# Allegro board pc042a_toplevel_13.brd
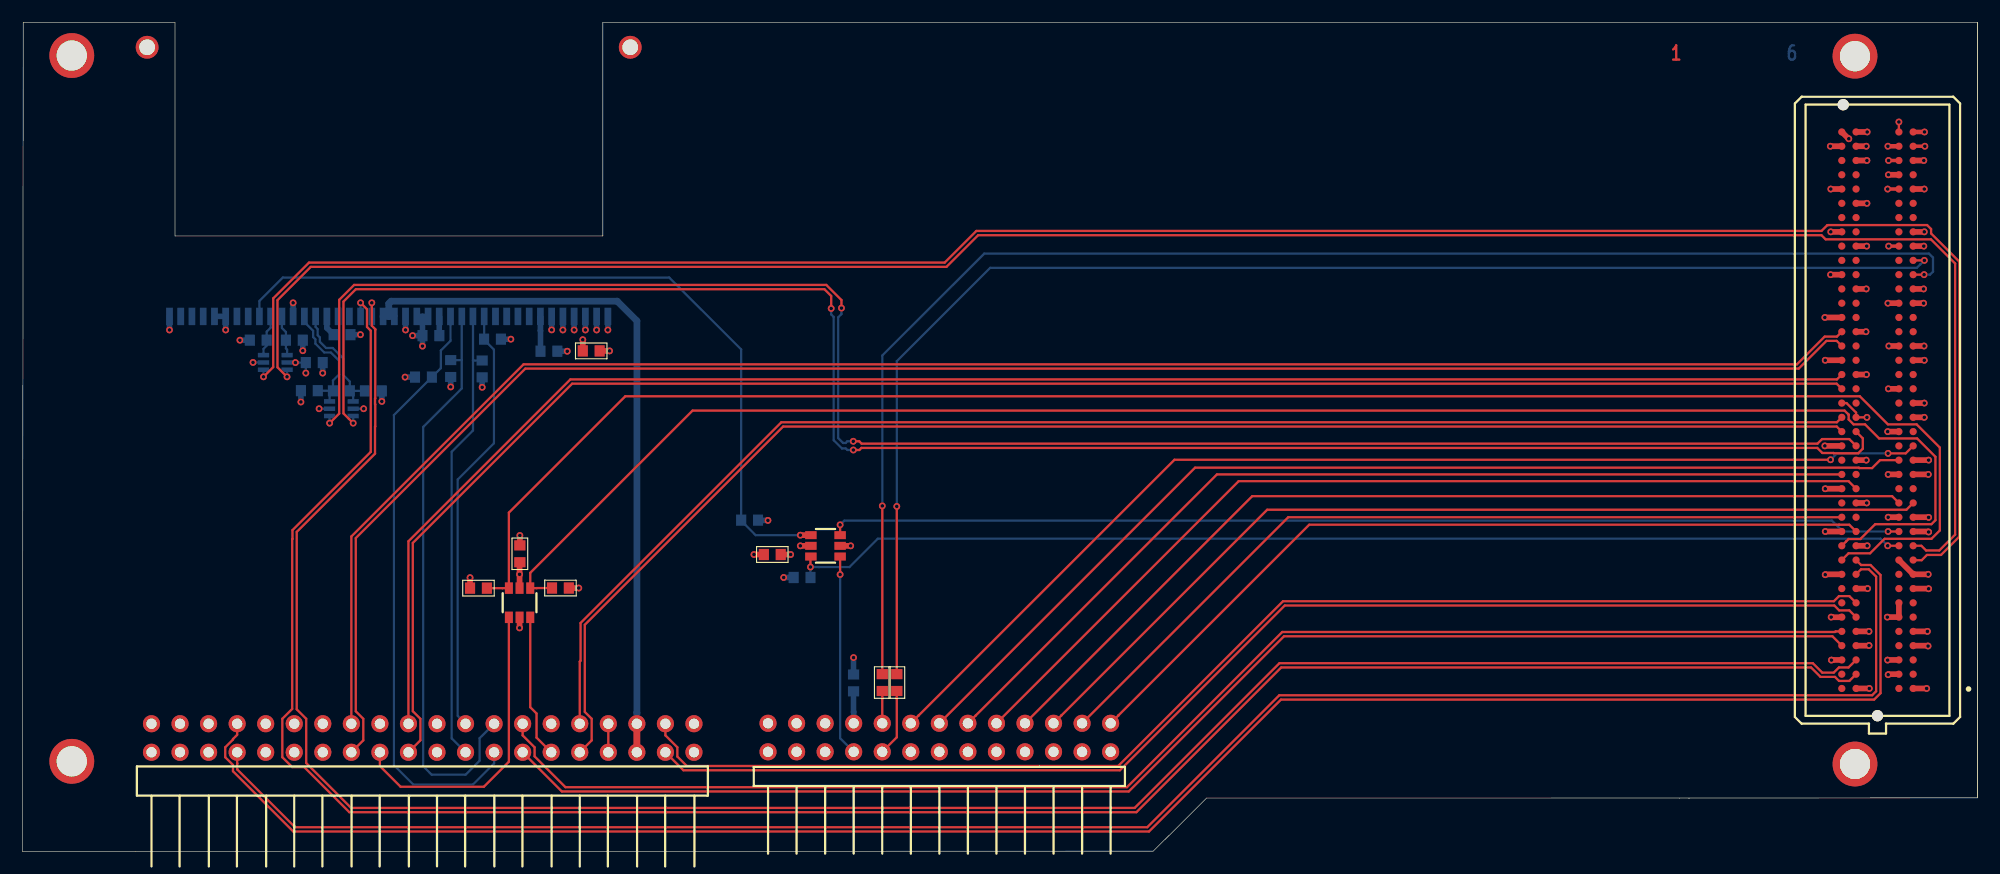
[diagram p0: board, top side]
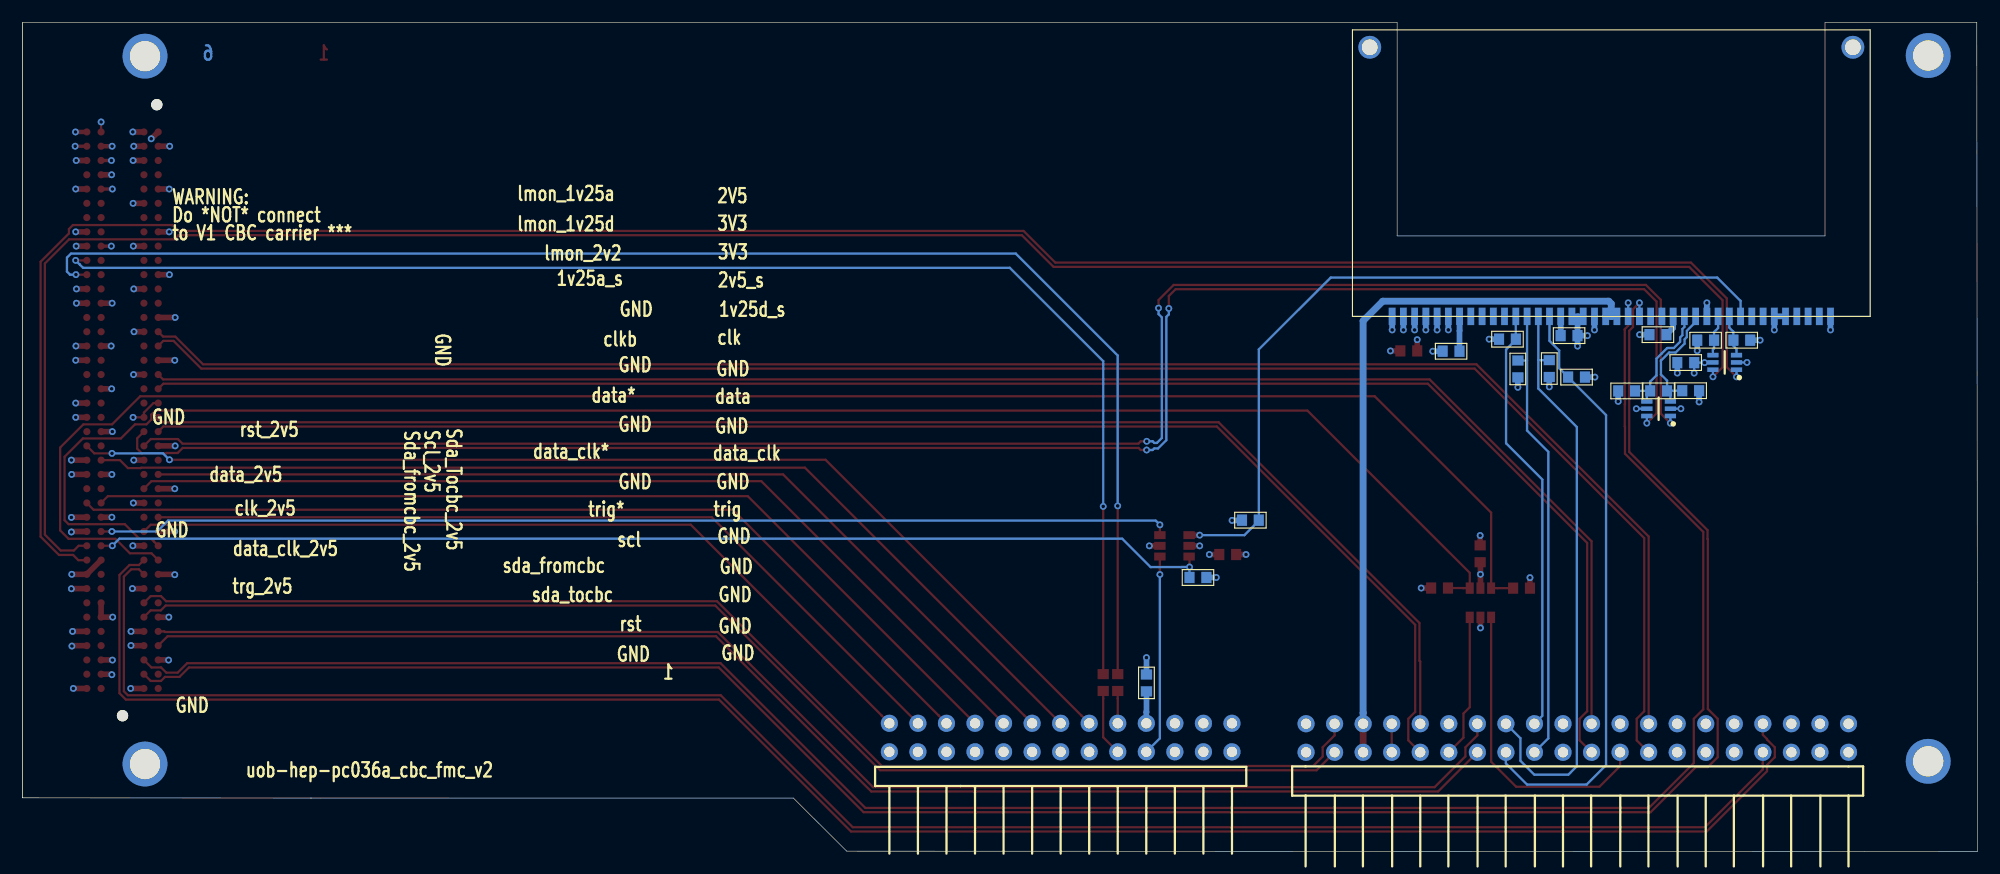
[diagram p1: board, bottom side, seen from below]

Outline 173.93 x 73.79 mm; copper layers: TOP, L2, L3, L4, L5, BOTTOM. Coordinates in mm from the lower left corner of the outline.
Outline path: 173.93,4.79 173.93,73.79 ; 0,0 10.06,0 100.6,0.03 105.34,4.76 147.45,4.76 148.27,4.76 148.27,4.76 173.93,4.78 173.93,4.8 173.93,73.79 51.64,73.79 51.64,54.8 51.63,54.79 13.57,54.79 13.57,73.79 0.07,73.79 0,0

## Design rules (mm)
net group FMC_LA: nets FMC_LA<1> FMC_LA<2> FMC_LA<17> FMC_LA<18> FMC_LA<20> FMC_LA<22> FMC_LA<23> FMC_LA<24> FMC_LA<25> FMC_LA<26> FMC_LA<27> FMC_LA<28> FMC_LA<29> FMC_LA<30> FMC_LA<31> FMC_LA<32> FMC_LA<33> RDATA2 RDATA3 RDATA6 RDATA7
net group FMC_LA*: nets FMC_LA*<1> FMC_LA*<2> FMC_LA*<7> FMC_LA*<8> FMC_LA*<9> FMC_LA*<10> FMC_LA*<11> FMC_LA*<12> FMC_LA*<13> FMC_LA*<14> FMC_LA*<17> FMC_LA*<18> FMC_LA*<20> FMC_LA*<22> FMC_LA*<23> FMC_LA*<24> FMC_LA*<25> FMC_LA*<26> FMC_LA*<27> FMC_LA*<28> FMC_LA*<29> FMC_LA*<30> FMC_LA*<31> FMC_LA*<32> FMC_LA*<33>

## Placement (name value [footprint] x y rotation side)
C3  100nF  [C0603]  50.6 44.56 180 top
C4  100nF  [C0603]  46.83 44.53 180 bottom
C5  100nF  [C0603]  36.34 45.92 0 bottom
C6  100nF  [C0603]  28.43 46 180 bottom
C7  1.0uF  [C0603]  66.71 26.44 0 top
C8  100nF  [C0603]  25.96 43.52 180 bottom
C9  1.0uF  [C0603]  44.25 26.5 270 top
IC1  -  [SOP65P210X110-6N]  28.37 39.41 0 bottom
IC2  -  [SOP65P210X110-6N]  22.49 43.53 0 bottom
J1  -  [CONHE13C2X20M]  11.48 11.37 90 bottom
J2  -  [CONHE13C2X13M]  66.33 11.41 270 bottom
J3  -  [SAMTEC_ASP-134606-01]  165.03 39.28 270 top
LK1  -  [FXG_M2-7]  163.03 70.79 0 top
LK2  -  [FXG_M2-7]  163.03 7.79 0 top
LK3  -  [FXG_M2-7]  4.39 8.03 0 top
LK4  -  [FXG_M2-7]  4.39 70.85 0 top
NOREF  -  []  27.73 -72.81 0 top
NOREF#2  -  []  173.93 4.79 90 top
NOREF#3  -  []  0 0 89.9 top
NOREF#4  -  []  0.07 73.79 0 top
R1  100  [C0603]  28.37 41 180 bottom
R2  390  [C0603]  31.22 40.99 0 bottom
R3  390  [C0603]  25.52 41.01 180 bottom
R4  10k  [C0603]  35.67 42.23 180 bottom
R5  10k  [C0603]  38.1 42.98 270 bottom
R6  10k  [C0603]  40.89 42.95 270 bottom
R7  10k  [C0603]  41.82 45.6 0 bottom
R8  00  [C0603]  73.94 15.01 90 bottom
R9  00  [C0603]  77.78 15.04 90 top
R10  00  [C0603]  76.49 15.04 90 top
R11  1k  [C0603]  69.35 24.39 180 bottom
R12  1k  [C0603]  40.57 23.44 180 top
R13  1k  [C0603]  47.86 23.45 0 top
R14  1k  [C0603]  64.69 29.49 0 bottom
R15  24  [C0603]  24.19 45.51 180 bottom
R16  24  [C0603]  20.98 45.51 0 bottom
U1  -  [SK_SAMTEC_MB1_140_01]  13.08 47.63 270 bottom
U2  -  [SOT23_6]  72.74 26.26 90 top
U3  -  [SOT23_6]  43.27 20.84 0 top

## Library data of the parts
C3-C6 C8 = CAPCERSMDCL2: part number: CAPCERSMDCL2_0603-100NF,16V; tolerance: 10%
C7 C9 = CAPCERSMDCL2: part number: CAPCERSMDCL2_0603-1.0UF,6.3V; tolerance: 10%
IC1 IC2 = ADCMP604: part number: ADCMP604BKSZ
J1 = CON40P: part number: CON40P-BARC2X20
J2 = CON26P: part number: CON26P-BARC2X13
J3 = CON160P_40CDGH: part number: ASP-134606-01
LK1-LK4 = 1-HOLE: part number: 1-HOLE_FXG2-7-BASE
R1 = RSMD0603: part number: RSMD0603_1/10W-100,1%; tolerance: 1%
R2 R3 = RSMD0603: part number: RSMD0603_1/10W-390,1%; tolerance: 1%
R4-R7 = RSMD0603: part number: RSMD0603_1/10W-10K,1%; tolerance: 1%
R8-R10 = RSMD0603: part number: RSMD0603_-00,
R11-R14 = RSMD0603: part number: RSMD0603_1/10W-1K,1%; tolerance: 1%
R15 R16 = RSMD0603: part number: RSMD0603_1/10W-24,1%; tolerance: 1%
U1 = SK-SAMTEC-40PIN-MB1: part number: SK-SAMTEC-40PIN-MB1_RT-SMT-SAMTEC
U2 U3 = SN74AUC2G07: part number: SN74AUC2G07_SOT-TI

## Footprints (pads in the part's own frame, mm; a bottom-side part is the same pattern mirrored in y, then rotated)
C0603
  rect 0.9x1 smd: 1(-0.75,0) 2(0.75,0)
CONHE13C2X13M
  round 1.524 hole 0.914: 1(0,0) 2(2.54,0) 3(0,-2.54) 4(2.54,-2.54) 5(0,-5.08) 6(2.54,-5.08) 7(0,-7.62) 8(2.54,-7.62) 9(0,-10.16) 10(2.54,-10.16) 11(0,-12.7) 12(2.54,-12.7) 13(0,-15.24) 14(2.54,-15.24) 15(0,-17.78) 16(2.54,-17.78) 17(0,-20.32) 18(2.54,-20.32) 19(0,-22.86) 20(2.54,-22.86) 21(0,-25.4) 22(2.54,-25.4) 23(0,-27.94) 24(2.54,-27.94) 25(0,-30.48) 26(2.54,-30.48)
CONHE13C2X20M
  round 1.524 hole 0.914: 1(0,0) 2(-2.54,0) 3(0,2.54) 4(-2.54,2.54) 5(0,5.08) 6(-2.54,5.08) 7(0,7.62) 8(-2.54,7.62) 9(0,10.16) 10(-2.54,10.16) 11(0,12.7) 12(-2.54,12.7) 13(0,15.24) 14(-2.54,15.24) 15(0,17.78) 16(-2.54,17.78) 17(0,20.32) 18(-2.54,20.32) 19(0,22.86) 20(-2.54,22.86) 21(0,25.4) 22(-2.54,25.4) 23(0,27.94) 24(-2.54,27.94) 25(0,30.48) 26(-2.54,30.48) 27(0,33.02) 28(-2.54,33.02) 29(0,35.56) 30(-2.54,35.56) 31(0,38.1) 32(-2.54,38.1) 33(0,40.64) 34(-2.54,40.64) 35(0,43.18) 36(-2.54,43.18) 37(0,45.72) 38(-2.54,45.72) 39(0,48.26) 40(-2.54,48.26)
FXG_M2-7
  round 3.988 hole 2.692: 1(0,0)
SAMTEC_ASP-134606-01
  round 1 hole 1.3 unplated: (-27.19,-3.05) (27.19,0)
  round 0.64 smd: C1(24.765,3.175) C2(23.495,3.175) C3(22.225,3.175) C4(20.955,3.175) C5(19.685,3.175) C6(18.415,3.175) C7(17.145,3.175) C8(15.875,3.175) C9(14.605,3.175) C10(13.335,3.175) C11(12.065,3.175) C12(10.795,3.175) C13(9.525,3.175) C14(8.255,3.175) C15(6.985,3.175) C16(5.715,3.175) C17(4.445,3.175) C18(3.175,3.175) C19(1.905,3.175) C20(0.635,3.175) C21(-0.635,3.175) C22(-1.905,3.175) C23(-3.175,3.175) C24(-4.445,3.175) C25(-5.715,3.175) C26(-6.985,3.175) C27(-8.255,3.175) C28(-9.525,3.175) C29(-10.795,3.175) C30(-12.065,3.175) C31(-13.335,3.175) C32(-14.605,3.175) C33(-15.875,3.175) C34(-17.145,3.175) C35(-18.415,3.175) C36(-19.685,3.175) C37(-20.955,3.175) C38(-22.225,3.175) C39(-23.495,3.175) C40(-24.765,3.175) D1(24.765,1.905) D2(23.495,1.905) D3(22.225,1.905) D4(20.955,1.905) D5(19.685,1.905) D6(18.415,1.905) D7(17.145,1.905) D8(15.875,1.905) D9(14.605,1.905) D10(13.335,1.905) D11(12.065,1.905) D12(10.795,1.905) D13(9.525,1.905) D14(8.255,1.905) D15(6.985,1.905) D16(5.715,1.905) D17(4.445,1.905) D18(3.175,1.905) D19(1.905,1.905) D20(0.635,1.905) D21(-0.635,1.905) D22(-1.905,1.905) D23(-3.175,1.905) D24(-4.445,1.905) D25(-5.715,1.905) D26(-6.985,1.905) D27(-8.255,1.905) D28(-9.525,1.905) D29(-10.795,1.905) D30(-12.065,1.905) D31(-13.335,1.905) D32(-14.605,1.905) D33(-15.875,1.905) D34(-17.145,1.905) D35(-18.415,1.905) D36(-19.685,1.905) D37(-20.955,1.905) D38(-22.225,1.905) D39(-23.495,1.905) D40(-24.765,1.905) G1(24.765,-1.905) G2(23.495,-1.905) G3(22.225,-1.905) G4(20.955,-1.905) G5(19.685,-1.905) G6(18.415,-1.905) G7(17.145,-1.905) G8(15.875,-1.905) G9(14.605,-1.905) G10(13.335,-1.905) G11(12.065,-1.905) G12(10.795,-1.905) G13(9.525,-1.905) G14(8.255,-1.905) G15(6.985,-1.905) G16(5.715,-1.905) G17(4.445,-1.905) G18(3.175,-1.905) G19(1.905,-1.905) G20(0.635,-1.905) G21(-0.635,-1.905) G22(-1.905,-1.905) G23(-3.175,-1.905) G24(-4.445,-1.905) G25(-5.715,-1.905) G26(-6.985,-1.905) G27(-8.255,-1.905) G28(-9.525,-1.905) G29(-10.795,-1.905) G30(-12.065,-1.905) G31(-13.335,-1.905) G32(-14.605,-1.905) G33(-15.875,-1.905) G34(-17.145,-1.905) G35(-18.415,-1.905) G36(-19.685,-1.905) G37(-20.955,-1.905) G38(-22.225,-1.905) G39(-23.495,-1.905) G40(-24.765,-1.905) H1(24.765,-3.175) H2(23.495,-3.175) H3(22.225,-3.175) H4(20.955,-3.175) H5(19.685,-3.175) H6(18.415,-3.175) H7(17.145,-3.175) H8(15.875,-3.175) H9(14.605,-3.175) H10(13.335,-3.175) H11(12.065,-3.175) H12(10.795,-3.175) H13(9.525,-3.175) H14(8.255,-3.175) H15(6.985,-3.175) H16(5.715,-3.175) H17(4.445,-3.175) H18(3.175,-3.175) H19(1.905,-3.175) H20(0.635,-3.175) H21(-0.635,-3.175) H22(-1.905,-3.175) H23(-3.175,-3.175) H24(-4.445,-3.175) H25(-5.715,-3.175) H26(-6.985,-3.175) H27(-8.255,-3.175) H28(-9.525,-3.175) H29(-10.795,-3.175) H30(-12.065,-3.175) H31(-13.335,-3.175) H32(-14.605,-3.175) H33(-15.875,-3.175) H34(-17.145,-3.175) H35(-18.415,-3.175) H36(-19.685,-3.175) H37(-20.955,-3.175) H38(-22.225,-3.175) H39(-23.495,-3.175) H40(-24.765,-3.175)
SK_SAMTEC_MB1_140_01
  round 2.032 hole 1.4: (-23.952,-40.99) (-23.952,1.99)
  rect 1.55x0.6 smd: 1(0,0) 2(0,-1) 3(0,-2) 4(0,-3) 5(0,-4) 6(0,-5) 7(0,-6) 8(0,-7) 9(0,-8) 10(0,-9) 11(0,-10) 12(0,-11) 13(0,-12) 14(0,-13) 15(0,-14) 16(0,-15) 17(0,-16) 18(0,-17) 19(0,-18) 20(0,-19) 21(0,-20) 22(0,-21) 23(0,-22) 24(0,-23) 25(0,-24) 26(0,-25) 27(0,-26) 28(0,-27) 29(0,-28) 30(0,-29) 31(0,-30) 32(0,-31) 33(0,-32) 34(0,-33) 35(0,-34) 36(0,-35) 37(0,-36) 38(0,-37) 39(0,-38) 40(0,-39)
SOP65P210X110-6N
  rect 1x0.4 smd: 1(-1.05,0.65) 2(-1.05,0) 3(-1.05,-0.65) 4(1.05,-0.65) 5(1.05,0) 6(1.05,0.65)
SOT23_6
  rect 0.711x1.016 smd: 1(0,0) 2(0.95,0) 3(1.9,0) 4(1.9,2.6) 5(0.95,2.6) 6(0,2.6)

## Nets
GND_SIGNAL: C3.1(A<0>) C4.1(A<0>) C5.1(A<0>) C6.1(A<0>) C7.1(A<0>) C8.1(A<0>) C9.1(A<0>) IC1.2(VEE) IC2.2(VEE) J1.2(A<1>) J1.5(A<4>) J1.6(A<5>) J1.9(A<8>) J1.10(A<9>) J1.13(A<12>) J1.14(A<13>) J2.6(A<5>) J2.12(A<11>) J2.14(A<13>) J2.16(A<15>) J2.18(A<17>) J2.20(A<19>) J2.22(A<21>) J2.24(A<23>) J2.26(A<25>) J3.C1(C<1>) J3.C4(C<4>) J3.C5(C<5>) J3.C8(C<8>) J3.C9(C<9>) J3.C12(C<12>) J3.C13(C<13>) J3.C16(C<16>) J3.C17(C<17>) J3.C20(C<20>) J3.C21(C<21>) J3.C24(C<24>) J3.C25(C<25>) J3.C28(C<28>) J3.C29(C<29>) J3.C32(C<32>) J3.C33(C<33>) J3.C36(C<36>) J3.C38(C<38>) J3.C40(C<40>) J3.D2(D<2>) J3.D3(D<3>) J3.D6(D<6>) J3.D7(D<7>) J3.D10(D<10>) J3.D13(D<13>) J3.D16(D<16>) J3.D19(D<19>) J3.D22(D<22>) J3.D25(D<25>) J3.D28(D<28>) J3.D37(D<37>) J3.D39(D<39>) J3.G1(G<1>) J3.G4(G<4>) J3.G5(G<5>) J3.G8(G<8>) J3.G11(G<11>) J3.G14(G<14>) J3.G17(G<17>) J3.G20(G<20>) J3.G23(G<23>) J3.G26(G<26>) J3.G29(G<29>) J3.G32(G<32>) J3.G35(G<35>) J3.G38(G<38>) J3.G40(G<40>) J3.H3(H<3>) J3.H6(H<6>) J3.H9(H<9>) J3.H12(H<12>) J3.H15(H<15>) J3.H18(H<18>) J3.H21(H<21>) J3.H24(H<24>) J3.H27(H<27>) J3.H30(H<30>) J3.H33(H<33>) J3.H36(H<36>) J3.H39(H<39>) LK1.1(A<0>) LK2.1(A<0>) LK3.1(A<0>) LK4.1(A<0>) R15.1(A<0>) R16.1(A<0>) U1.1(A<0>) U1.5(A<4>) U1.6(A<5>) U1.12(A<11>) U1.23(A<22>) U1.24(A<23>) U1.37(A<36>) U1.38(A<37>) U1.39(A<38>) U1.40(A<39>) U2.2 U3.2
P1V5A: J1.35(A<34>) J1.36(A<35>) U1.20(A<19>) U1.21(A<20>)
P2V5: C7.2(B<0>) J3.G39(G<39>) J3.H40(H<40>) R11.2(B<0>) R12.2(B<0>) R13.2(B<0>) U2.5
P3V3: C9.2(B<0>) J3.C39(C<39>) J3.D32(D<32>) J3.D36(D<36>) J3.D38(D<38>) J3.D40(D<40>) R8.2(B<0>) R14.2(B<0>) U3.5
P5V: J1.17(A<16>)
P12V: J3.C35(C<35>) J3.C37(C<37>)
A0: J1.23(A<22>) R7.1(A<0>) U1.29(A<28>)
A1: J1.24(A<23>) R6.1(A<0>) U1.28(A<27>)
A1+: J1.12(A<11>)
A1-: J1.11(A<10>)
A2: J1.25(A<24>) R5.1(A<0>) U1.27(A<26>)
A2+: J1.4(A<3>)
A2-: J1.3(A<2>)
A3: J1.26(A<25>) R4.1(A<0>) U1.26(A<25>)
BIAS: J1.40(A<39>)
BIAS_GND: J1.39(A<38>)
CA1+: IC2.3(+IN) R16.2(B<0>) U1.10(A<9>)
CA1-: IC2.4(-IN) R15.2(B<0>) U1.11(A<10>)
CCLK_ROC+: J3.G2(G<2>) U1.18(A<17>)
CCLK_ROC-: J3.G3(G<3>) U1.19(A<18>)
CCLK_SEL: U1.4(A<3>)
CCTR+: U1.16(A<15>)
CCTR-: U1.17(A<16>)
CI2C_CLK+: U1.2(A<1>)
CI2C_CLK-: U1.3(A<2>)
CI2C_DAT+: U1.30(A<29>)
CI2C_DAT-: U1.31(A<30>)
CRESET*: R14.1(A<0>) U1.9(A<8>) U2.4(Y)
CTIN+: U1.7(A<6>)
CTIN-: U1.8(A<7>)
CTOUT+: U1.32(A<31>)
CTOUT-: U1.33(A<32>)
CTRIGOUT+: IC1.3(+IN) R1.2(B<0>) R3.1(A<0>) U1.13(A<12>)
CTRIGOUT-: IC1.4(-IN) R1.1(A<0>) R2.1(A<0>) U1.14(A<13>)
DP0_C2M: J3.C2(C<2>)
DP0_C2M*: J3.C3(C<3>)
DP0_M2C: J3.C6(C<6>)
DP0_M2C*: J3.C7(C<7>)
FA1+: IC2.1(Q) J3.C10(C<10>)
FA1-: IC2.6(Q*) J3.C11(C<11>)
FCLK_SEL_IN: J3.H10(H<10>) R12.1(A<0>) U3.6(Y)
FMC_LA*<1>: J3.D9(D<9>)
FMC_LA*<2>: J3.H8(H<8>)
FMC_LA*<7>: J3.H14(H<14>)
FMC_LA*<8>: J3.G13(G<13>)
FMC_LA*<9>: J3.D15(D<15>)
FMC_LA*<10>: J3.C15(C<15>)
FMC_LA*<11>: J3.H17(H<17>)
FMC_LA*<12>: J3.G16(G<16>)
FMC_LA*<13>: J3.D18(D<18>)
FMC_LA*<14>: J3.C19(C<19>)
FMC_LA*<17>: J3.D21(D<21>)
FMC_LA*<18>: J3.C23(C<23>)
FMC_LA*<20>: J3.G22(G<22>)
FMC_LA*<22>: J3.G25(G<25>)
FMC_LA*<23>: J3.D24(D<24>)
FMC_LA*<24>: J3.H29(H<29>)
FMC_LA*<25>: J3.G28(G<28>)
FMC_LA*<26>: J3.D27(D<27>)
FMC_LA*<27>: J3.C27(C<27>)
FMC_LA*<28>: J3.H32(H<32>)
FMC_LA*<29>: J3.G31(G<31>)
FMC_LA*<30>: J3.H35(H<35>)
FMC_LA*<31>: J3.G34(G<34>)
FMC_LA*<32>: J3.H38(H<38>)
FMC_LA*<33>: J3.G37(G<37>)
FMC_LA<1>: J3.D8(D<8>)
FMC_LA<2>: J3.H7(H<7>)
FMC_LA<17>: J3.D20(D<20>)
FMC_LA<18>: J3.C22(C<22>)
FMC_LA<20>: J3.G21(G<21>)
FMC_LA<22>: J3.G24(G<24>)
FMC_LA<23>: J3.D23(D<23>)
FMC_LA<24>: J3.H28(H<28>)
FMC_LA<25>: J3.G27(G<27>)
FMC_LA<26>: J3.D26(D<26>)
FMC_LA<27>: J3.C26(C<26>)
FMC_LA<28>: J3.H31(H<31>)
FMC_LA<29>: J3.G30(G<30>)
FMC_LA<30>: J3.H34(H<34>)
FMC_LA<31>: J3.G33(G<33>)
FMC_LA<32>: J3.H37(H<37>)
FMC_LA<33>: J3.G36(G<36>)
FMC_PRSNT_M2C_L: J3.H2(H<2>)
FMC_PWR_GOOD_FLASH_RST_B: J3.D1(D<1>)
FMC_TCK_BUF: J3.D29(D<29>)
FMC_TDO: J3.D31(D<31>)
FMC_TMS_BUF: J3.D33(D<33>)
FPGA_TDO: J3.D30(D<30>)
FPON: J3.D11(D<11>) R11.1(A<0>) U2.6(Y)
FRESET_IN*: J3.H11(H<11>) R13.1(A<0>) U3.4(Y)
FRESET_OUT*: J3.D12(D<12>) U2.3(A)
FTRIGOUT+: IC1.1(Q) J3.G18(G<18>)
FTRIGOUT-: IC1.6(Q*) J3.G19(G<19>)
GA0: J3.C34(C<34>)
GA1: J3.D35(D<35>)
GBTCLK0_M2C: J3.D4(D<4>)
GBTCLK0_M2C*: J3.D5(D<5>)
IIC_SCL_MAIN: J3.C30(C<30>) R10.2(B<0>)
IIC_SDA_MAIN: J3.C31(C<31>) R9.2(B<0>)
RCLK_ROC+: J1.28(A<27>) J3.H4(H<4>)
RCLK_ROC-: J1.27(A<26>) J3.H5(H<5>)
RCLK_SEL: J1.18(A<17>) U3.1(A)
RCTR+: J1.32(A<31>) J3.H19(H<19>)
RCTR-: J1.31(A<30>) J3.H20(H<20>)
RDATA0: J2.11(A<10>) J3.C18(C<18>)
RDATA1: J2.13(A<12>) J3.D17(D<17>)
RDATA2: J2.15(A<14>) J3.H16(H<16>)
RDATA3: J2.17(A<16>) J3.G15(G<15>)
RDATA4: J2.19(A<18>) J3.D14(D<14>)
RDATA5: J2.21(A<20>) J3.C14(C<14>)
RDATA6: J2.23(A<22>) J3.H13(H<13>)
RDATA7: J2.25(A<24>) J3.G12(G<12>)
RI2C_CLK+: J1.22(A<21>)
RI2C_CLK-: J1.21(A<20>)
RI2C_DAT+: J1.38(A<37>) J3.G6(G<6>)
RI2C_DAT-: J1.37(A<36>) J3.G7(G<7>)
RPON: J2.8(A<7>) U2.1(A)
RRESET*: J1.30(A<29>) U3.3(A)
RTIN+: J1.20(A<19>) J3.H22(H<22>)
RTIN-: J1.19(A<18>) J3.H23(H<23>)
RTOUT+: J1.16(A<15>) J3.H25(H<25>)
RTOUT-: J1.15(A<14>) J3.H26(H<26>)
RTRIGOUT+: J1.8(A<7>) J3.G9(G<9>)
RTRIGOUT-: J1.7(A<6>) J3.G10(G<10>)
SUPPLY_1: C3.2(B<0>) C8.2(B<0>) IC1.5(VCC) IC2.5(VCC) J1.33(A<32>) J1.34(A<33>) R2.2(B<0>) R3.2(B<0>) R4.2(B<0>) R5.2(B<0>) R6.2(B<0>) R7.2(B<0>) U1.22(A<21>) U1.35(A<34>) U1.36(A<35>)
TRST_L: J3.D34(D<34>)
UNNAMED_2_CAPCERSMDCL2_I501_B: C6.2(B<0>) U1.15(A<14>)
UNNAMED_2_CAPCERSMDCL2_I503_B: C5.2(B<0>) U1.25(A<24>)
UNNAMED_2_CAPCERSMDCL2_I505_B: C4.2(B<0>) U1.34(A<33>)
UNNAMED_8_CON26P_I485_A: J2.7(A<6>) R8.1(A<0>)
UNNAMED_8_CON26P_I485_A_1: J2.10(A<9>) R9.1(A<0>)
UNNAMED_8_CON26P_I485_A_2: J2.9(A<8>) R10.1(A<0>)
VREF_A_M2C: J3.H1(H<1>)

Pads without a net: J1 1 29; J2 1 2 3 4 5

## Via types
v1: diameter 0.61, hole 0.33, TOP to BOTTOM, 129 vias

## Routing (per net, layer and track width the routed paths; a pad name or vN(x,y) marks a point on that pad's centre or on a via; arc(x,y) is an arc through that point)
GND_SIGNAL: length 327.9
  TOP w0.2: 161.86,39.91 162.28,39.91 163.13,39.06 163.13,38.64 v1(164.09,38.64)
  TOP w0.4: 168.21,64.04 v1(169.22,64.04) ; J3.D39 v1(165.96,62.77)
  TOP w0.5: v1(165.98,15.74) 166.03,15.78 166.94,15.78 ; 166.94,22.13 166.94,20.86 v1(165.91,20.86) ; J3.C24 v1(169.19,43.72) ; v1(169.55,24.67) J3.C9 166.94,25.94 ; J3.G14 v1(164.07,31.02) ; v1(164.28,18.34) 164.27,18.32 J3.G4 ; J3.H30 v1(160.86,51.34) ; 168.21,38.64 v1(169.19,38.64) ; J3.C5 v1(169.48,19.59) ; 161.86,17.05 161.08,17.05 161.06,17.04 v1(160.93,17.04) ; v1(160.38,24.64) 160.42,24.67 161.86,24.67 ; 163.13,50.07 v1(164.03,50.07) ; J3.G1 v1(164.31,14.51) ; v1(169.53,18.29) 169.5,18.32 J3.C4 ; 163.13,46.26 v1(164.01,46.26) ; J3.H36 v1(160.88,58.96) ; 166.94,17.05 165.95,17.05 v1(165.93,17.04) ; J3.G11 v1(164.11,27.21) ; 163.13,23.4 v1(164.15,23.4) ; J3.G5 v1(164.28,19.59) ; U3.2 v1(44.22,19.9) ; J3.C1 v1(169.41,14.51) ; C3.1 v1(52.23,44.56) ; v1(160.91,20.86) 161.02,20.86 161.03,20.85 161.74,20.85 161.76,20.86 161.86,20.86 ; 168.21,48.8 v1(169.13,48.8) ; C9.1 v1(44.25,28.13) ; J3.C17 169.58,34.83 v1(169.58,34.84) ; 168.21,23.4 169.57,23.4 v1(169.58,23.39) ; J3.H33 v1(160.88,55.15) ; 168.21,53.88 v1(169.15,53.88) ; 163.13,64.04 v1(164.11,64.04) ; J3.C21 v1(169.19,39.91) ; C7.1 v1(65.08,26.44) ; 166.94,37.37 v1(165.94,37.37) ; U2.2 v1(73.68,27.21) ; 168.21,44.99 v1(169.17,44.99) ; J3.C12 169.54,28.48 v1(169.58,28.44) ; J3.D25 v1(166.04,44.99) ; 163.13,53.88 v1(164.07,53.88) ; J3.C13 169.57,29.75 v1(169.58,29.74) ; J3.D28 v1(165.96,48.8) ; 166.94,41.18 v1(166,41.18) ; J3.H39 v1(160.84,62.77) ; 163.13,61.5 v1(164.09,61.5) ; J3.H24 v1(160.38,43.72) ; 161.86,28.48 v1(160.39,28.48) ; 166.94,33.56 v1(165.98,33.56) ; 168.21,55.15 v1(169.19,55.15) ; 161.86,36.1 v1(160.35,36.1) ; J3.G17 v1(164.03,34.83) ; v1(160.38,32.29) 160.39,32.29 161.86,32.29 ; 163.13,42.45 v1(164.05,42.45) ; 168.21,61.5 v1(169.15,61.5) ; J3.D37 v1(166,60.23) ; 163.13,57.69 v1(164.09,57.69) ; 166.94,29.75 v1(165.98,29.75) ; J3.H27 v1(160.35,47.53) ; J3.C16 v1(169.56,33.56) ; 168.21,50.07 v1(169.13,50.07) ; 168.21,58.96 v1(169.19,58.96)
  L2 w0.2: J2.16 85.3,8.87 ; J2.16 83.22,9.77 ; J2.16 84.11,10.06 ; J2.16 83.22,7.98 ; J2.16 85,9.77 ; J2.16 84.11,7.68 ; J2.16 85,7.98 ; J2.16 82.92,8.87 ; J1.13 27.61,12.27 ; J1.13 25.83,12.27 ; J1.13 27.91,11.37 ; J1.13 27.61,10.48 ; J1.13 25.53,11.37 ; J1.13 25.83,10.48 ; J1.13 26.72,10.18 ; J1.13 26.72,12.56 ; 1.74,70.85 LK4.1 ; LK4.1 2.46,68.92 ; LK4.1 4.39,68.2 ; LK4.1 7.04,70.85 ; LK4.1 6.31,68.92 ; LK4.1 6.31,72.77 ; LK4.1 2.46,72.77 ; J2.20 90.38,8.87 ; J2.20 89.19,7.68 ; J2.20 88,8.87 ; J2.20 90.08,9.77 ; J2.20 88.3,7.98 ; J2.20 88.3,9.77 ; J2.20 90.08,7.98 ; J2.20 89.19,10.06 ; 21.64,7.64 J1.10 ; J1.10 21.64,10.02 ; J1.10 22.53,9.73 ; J1.10 22.83,8.83 ; J1.10 20.45,8.83 ; J1.10 20.75,7.94 ; J1.10 22.53,7.94 ; J1.10 20.75,9.73 ; J2.12 79.03,10.06 ; J2.12 78.14,7.98 ; J2.12 79.92,9.77 ; J2.12 78.14,9.77 ; J2.12 79.92,7.98 ; J2.12 77.84,8.87 ; J2.12 80.22,8.87 ; J2.12 79.03,7.68 ; 15.67,9.73 J1.6 ; J1.6 15.37,8.83 ; J1.6 15.67,7.94 ; J1.6 16.56,7.64 ; J1.6 17.75,8.83 ; J1.6 16.56,10.02 ; J1.6 17.45,9.73 ; J1.6 17.45,7.94 ; 96.81,7.68 J2.26 ; J2.26 95.62,8.87 ; J2.26 96.81,10.06 ; J2.26 95.92,9.77 ; J2.26 98,8.87 ; J2.26 97.7,9.77 ; J2.26 97.7,7.98 ; J2.26 95.92,7.98 ; 20.75,12.27 J1.9 ; J1.9 21.64,10.18 ; J1.9 22.53,12.27 ; J1.9 20.75,10.48 ; J1.9 22.53,10.48 ; J1.9 22.83,11.37 ; J1.9 21.64,12.56 ; J1.9 20.45,11.37 ; LK3.1 6.31,6.1 ; LK3.1 1.74,8.03 ; LK3.1 6.31,9.95 ; LK3.1 2.46,9.95 ; LK3.1 4.39,10.68 ; LK3.1 7.04,8.03 ; LK3.1 2.46,6.1 ; LK3.1 4.39,5.38 ; 80.68,9.77 J2.14 ; J2.14 80.68,7.98 ; J2.14 82.76,8.87 ; J2.14 80.38,8.87 ; J2.14 81.57,7.68 ; J2.14 82.46,9.77 ; J2.14 82.46,7.98 ; J2.14 81.57,10.06 ; J2.22 92.62,9.77 ; J2.22 91.73,10.06 ; J2.22 92.92,8.87 ; J2.22 90.84,9.77 ; J2.22 90.84,7.98 ; J2.22 91.73,7.68 ; J2.22 90.54,8.87 ; J2.22 92.62,7.98 ; J2.6 72.3,9.77 ; J2.6 72.3,7.98 ; J2.6 71.41,7.68 ; J2.6 71.41,10.06 ; J2.6 70.52,9.77 ; J2.6 70.52,7.98 ; J2.6 72.6,8.87 ; J2.6 70.22,8.87 ; J1.2 12.67,8.83 ; J1.2 10.29,8.83 ; J1.2 11.48,10.02 ; J1.2 11.48,7.64 ; J1.2 12.37,9.73 ; J1.2 10.59,7.94 ; J1.2 12.37,7.94 ; J1.2 10.59,9.73 ; 161.11,72.71 LK1.1 ; LK1.1 164.96,68.86 ; LK1.1 165.68,70.79 ; LK1.1 163.03,68.14 ; LK1.1 161.11,68.86 ; LK1.1 164.96,72.71 ; LK1.1 160.38,70.79 ; 25.53,8.83 J1.14 ; J1.14 27.61,7.94 ; J1.14 26.72,7.64 ; J1.14 27.61,9.73 ; J1.14 25.83,7.94 ; J1.14 26.72,10.02 ; J1.14 27.91,8.83 ; J1.14 25.83,9.73 ; J2.18 86.65,10.06 ; J2.18 87.54,7.98 ; J2.18 87.84,8.87 ; J2.18 86.65,7.68 ; J2.18 85.46,8.87 ; J2.18 85.76,9.77 ; J2.18 87.54,9.77 ; J2.18 85.76,7.98 ; J2.24 94.27,10.06 ; J2.24 93.08,8.87 ; J2.24 95.46,8.87 ; J2.24 95.16,9.77 ; J2.24 95.16,7.98 ; J2.24 93.38,9.77 ; J2.24 94.27,7.68 ; J2.24 93.38,7.98 ; J1.5 17.75,11.37 ; J1.5 17.45,12.27 ; J1.5 15.37,11.37 ; J1.5 17.45,10.48 ; J1.5 16.56,12.56 ; J1.5 15.67,12.27 ; J1.5 15.67,10.48 ; J1.5 16.56,10.18 ; LK2.1 165.68,7.79 ; LK2.1 161.11,9.71 ; LK2.1 160.38,7.79 ; LK2.1 163.03,10.44 ; LK2.1 161.11,5.86 ; LK2.1 164.96,9.71 ; LK2.1 164.96,5.86
  BOTTOM w0.2: IC1.2 v1(26.39,39.41) ; IC2.2 v1(20.51,43.53)
  BOTTOM w0.5: U1.1 v1(13.08,46.42) ; R16.1 v1(19.34,45.51) ; C5.1 v1(34.7,45.92) ; C5.1 v1(35.59,44.98) ; C5.1 35.59,47.63 ; 35.59,47.63 U1.24 ; 35.59,47.63 U1.23 ; U1.39 v1(51.08,46.42) ; U1.40 v1(52.08,46.42) ; C4.1 v1(48.47,44.53) ; U1.12 24.08,48.78 24.08,48.78 v1(24.08,48.84) ; U1.5 U1.6 v1(18.08,46.42) ; R15.1 v1(24.94,44.58) ; C6.1 v1(30.06,46) ; v1(49.08,46.42) U1.37 ; U1.38 v1(50.08,46.42) ; C8.1 v1(26.71,42.59)
P1V5A: length 63.4
  TOP w0.6: J1.36 J1.35
  BOTTOM w0.6: J1.35 54.66,12.36 54.66,12.37 54.66,47.23 52.91,48.98 32.8,48.98 32.59,48.76 32.59,47.63 ; 32.59,47.63 U1.21 ; 32.59,47.63 U1.20
P2V5: length 6.3
  TOP w0.5: 161.86,64.04 162.46,63.44 v1(162.48,63.44) ; U2.5 v1(69.2,27.21) ; R13.2 v1(49.49,23.45) ; 163.13,62.77 v1(164.03,62.77) ; R12.2 v1(39.82,24.37) ; C7.2 v1(68.34,26.44)
  BOTTOM w0.5: R11.2 v1(67.72,24.39)
P3V3: length 9.5
  TOP w0.2: 166.94,64.04 v1(166.94,64.93)
  TOP w0.3: 168.21,62.77 v1(169.25,62.77) ; J3.D32 v1(166.03,53.88) ; J3.D38 v1(166.02,61.5) ; J3.D36 v1(165.94,58.96)
  TOP w0.5: C9.2 44.22,25.72 v1(44.22,24.67) U3.5
  BOTTOM w0.5: R14.2 65.46,29.47 v1(66.32,29.47) ; R8.2 v1(73.94,17.26)
A0: length 38.2
  BOTTOM w0.2: U1.29 41.08,45.61 R7.1 41.07,45.55 41.94,44.67 41.94,36.33 38.72,33.11 38.72,12.07 J1.23
A1: length 40.9
  BOTTOM w0.2: R6.1 40.09,43.7 40.08,43.69 ; 40.08,43.69 40.08,37.47 38.18,35.58 38.18,10.07 J1.24 ; 40.08,43.69 U1.28
A2: length 52.1
  BOTTOM w0.2: 39.08,43.75 39.07,43.73 R5.1 ; 39.08,43.75 U1.27 ; 39.08,43.75 39.08,41.22 35.65,37.78 35.65,7.59 36.4,6.84 39.42,6.84 40.67,8.09 40.67,10.09 J1.25
A3: length 53.4
  BOTTOM w0.2: U1.26 38.08,45.46 37.22,44.6 37.22,43.02 36.43,42.23 ; 36.43,42.23 33.05,38.85 33.05,7.69 34.77,5.96 40.08,5.96 41.96,7.85 J1.26 ; 36.43,42.23 R4.1
CA1+: length 3.7
  BOTTOM w0.2: IC2.3 21.44,44.74 21.73,45.02 R16.2 21.73,46.27 22.08,46.63 U1.10 22.06,47.64
CA1-: length 3.6
  BOTTOM w0.2: 23.08,47.63 U1.11 23.08,46.6 23.44,46.24 R15.2 23.44,44.78 23.54,44.68 IC2.4
CCLK_ROC+: length 193.4
  TOP w0.2: v1(30.08,48.84) 30.65,48.26 30.65,46.69 30.98,46.35 30.98,35.57 24.02,28.6 24.02,27.82 23.99,27.8 23.99,12.69 23.12,11.81 23.12,8.39 23.99,7.52 25.06,7.52 29.08,3.5 99.1,3.5 111.99,16.38 159.12,16.38 159.96,15.54 161.25,15.54 161.61,15.18 162.53,15.18 163.13,15.78
  BOTTOM w0.2: v1(30.08,48.84) U1.18
CCLK_ROC-: length 191.2
  TOP w0.2: v1(31.08,48.84) 31.08,46.8 31.38,46.49 31.38,46.44 31.38,40.33 31.36,40.31 31.36,39.81 31.38,39.79 31.38,37.84 31.36,37.82 31.36,35.41 24.4,28.45 24.4,12.65 25.24,11.81 25.24,7.88 29.23,3.88 98.95,3.88 111.83,16.76 159.28,16.76 160.12,15.92 161.14,15.92 161.6,16.38 162.46,16.38 J3.G3
  BOTTOM w0.2: v1(31.08,48.84) U1.19
CRESET*: length 69.7
  TOP w0.5: U2.4 v1(69.2,28.16)
  BOTTOM w0.2: v1(69.2,28.16) 65.22,28.16 63.94,29.44 R14.1 63.94,44.69 57.54,51.09 23.16,51.09 21.08,49.01 U1.9
CTRIGOUT+: length 10.9
  BOTTOM w0.2: IC1.3 27.32,40.7 R1.2 ; U1.13 25.08,47.12 25.86,46.34 25.86,45.79 26.06,45.59 26.06,45.2 26.85,44.41 27.44,44.41 28.16,43.69 28.16,42.46 27.62,41.92 R1.2 ; R1.2 27.61,41.01 R3.1
CTRIGOUT-: length 10.7
  BOTTOM w0.2: R1.1 29.42,40.7 IC1.4 ; R1.1 29.12,41.82 28.56,42.38 28.56,43.86 28.09,44.34 28.08,44.34 27.61,44.81 27.01,44.81 26.46,45.37 26.46,45.75 26.26,45.96 26.26,46.51 26.08,46.69 U1.14 ; R1.1 30.46,41 R2.1
FA1+: length 191.7
  TOP w0.2: 168.21,25.94 168.22,25.93 168.96,25.93 169.43,26.4 170.69,26.4 172.32,28.03 172.32,52.49 169.8,55.01 169.8,55.4 169.45,55.76 160.63,55.76 160.62,55.75 160.57,55.75 160.05,55.23 84.86,55.23 82.04,52.42 25.49,52.42 22.31,49.23 22.31,43.11 v1(21.44,42.25)
  BOTTOM w0.2: IC2.1 v1(21.44,42.25)
FA1-: length 189.1
  TOP w0.2: J3.C11 168.94,27.21 169.36,26.79 170.53,26.79 171.94,28.2 171.94,52.34 169.79,54.49 160.42,54.49 160.05,54.85 85.02,54.85 82.2,52.04 25.65,52.04 22.69,49.07 22.69,43.1 v1(23.54,42.25)
  BOTTOM w0.2: v1(23.54,42.25) 23.54,42.87 IC2.6
FCLK_SEL_IN: length 159.4
  TOP w0.2: 161.86,25.94 162.46,26.54 164.37,26.54 165.66,27.83 169.83,27.83 170.58,28.58 170.58,35.95 168.51,38.02 165.96,38.02 163.46,40.52 53.63,40.52 43.27,30.16 U3.6 42.69,23.44 42.69,23.44 R12.1
FPON: length 100
  TOP w0.2: U2.6 70.1,26.22 v1(70.1,25.32) ; 166.94,27.21 v1(165.94,27.21)
  BOTTOM w0.2: R11.1 v1(70.1,25.32) 70.86,25.32 70.86,25.32 73.57,25.32 76.09,27.84 165.31,27.84 v1(165.94,27.21)
FRESET_IN*: length 151.2
  TOP w0.2: 161.86,27.21 162.24,27.6 162.24,27.6 162.45,27.81 163.51,27.81 164.83,29.13 169.83,29.13 170.19,29.49 170.19,35.13 168.56,36.77 165.18,36.77 163.92,38.02 162.9,38.02 162.47,38.45 162.47,38.87 162.46,38.88 162.46,38.89 162.1,39.24 59.61,39.24 45.17,24.8 U3.4 45.76,23.44 45.76,23.45 R13.1
FRESET_OUT*: length 95.7
  TOP w0.2: v1(72.74,29.08) U2.3 ; 166.94,28.48 v1(165.98,28.48)
  BOTTOM w0.2: v1(72.74,29.08) 73.12,29.45 160.98,29.45 161.95,28.48 v1(165.98,28.48)
FTRIGOUT+: length 161.5
  TOP w0.2: v1(27.33,38.13) 28.18,38.98 28.18,49.1 29.5,50.43 71.51,50.43 72.86,49.08 v1(72.86,48.37) ; v1(73.91,36.51) 74.44,36.51 74.65,36.3 159.69,36.3 160.1,36.71 162.52,36.71 163.13,36.1
  BOTTOM w0.2: IC1.1 27.32,38.36 27.33,38.35 v1(27.33,38.13) ; v1(72.86,48.37) 72.86,47.84 72.57,47.54 72.57,36.8 73.01,36.37 73.23,36.37 73.38,36.51 v1(73.91,36.51)
FTRIGOUT-: length 163
  TOP w0.2: 163.13,37.37 163.73,36.77 163.73,35.85 163.32,35.45 161.13,35.45 161.11,35.47 160.12,35.47 159.67,35.92 74.64,35.92 74.45,35.74 v1(73.92,35.74) ; v1(71.95,48.33) 71.95,49.44 71.34,50.05 29.66,50.05 28.56,48.95 28.56,38.99 29.05,38.51 29.05,38.51 v1(29.42,38.13)
  BOTTOM w0.2: v1(71.95,48.33) 71.95,47.8 72.17,47.58 72.17,36.61 72.91,35.87 73.25,35.87 73.39,35.74 v1(73.92,35.74) ; v1(29.42,38.13) IC1.6
IIC_SCL_MAIN: length 128.9
  TOP w0.2: v1(169.18,51.34) 168.21,51.34 ; 76.49,15.79 v1(76.49,30.76)
  BOTTOM w0.2: v1(169.18,51.34) 169.71,51.34 169.97,51.61 169.97,52.86 169.61,53.22 85.56,53.22 76.49,44.15 v1(76.49,30.76)
IIC_SDA_MAIN: length 124
  TOP w0.2: 77.78,15.79 v1(77.78,30.72) ; v1(169.2,52.61) 168.21,52.61
  BOTTOM w0.2: v1(169.2,52.61) 168.83,52.24 168.54,51.95 86.09,51.95 77.78,43.65 v1(77.78,30.72)
RCLK_ROC+: length 124.9
  TOP w0.2: J1.28 47.99,5.35 98.42,5.35 112.23,19.16 161.02,19.16 161.86,18.32
RCLK_ROC-: length 126.5
  TOP w0.2: J1.27 44.5,10.34 45.56,9.27 45.56,8.47 48.3,5.73 98.26,5.73 112.08,19.54 161.26,19.54 161.31,19.59 161.86,19.59
RCLK_SEL: length 27.2
  TOP w0.2: J1.18 31.8,7.6 33.64,5.76 41.04,5.76 43.27,7.99 U3.1
RCTR+: length 131.4
  TOP w0.2: 161.86,37.37 161.4,37.83 67.67,37.83 50.03,20.18 50.03,12.43 50.64,11.81 50.64,9.9 J1.32
RCTR-: length 128.8
  TOP w0.2: 161.86,38.64 161.42,38.21 67.51,38.21 49.65,20.34 49.65,16.98 49.58,16.91 J1.31
RDATA0: length 99.4
  TOP w0.2: v1(160.86,34.87) 102.49,34.87 79.73,12.11 79.73,12.11 J2.11 ; v1(165.97,35.44) 167.54,35.44 168.21,36.1
  BOTTOM w0.2: v1(160.86,34.87) 161.43,35.44 v1(165.97,35.44)
RDATA1: length 95.1
  TOP w0.2: 166.94,34.83 165.26,34.83 164.55,34.13 163.41,34.13 163.37,34.16 104.32,34.16 J2.13
RDATA2: length 86.9
  TOP w0.2: J2.15 84.81,12.11 84.81,12.11 106.26,33.56 161.86,33.56
RDATA3: length 85.7
  TOP w0.2: J3.G15 162.46,32.96 108.2,32.96 J2.17
RDATA4: length 86.4
  TOP w0.2: J2.19 109.4,31.63 166.33,31.63 166.94,31.02
RDATA5: length 84.6
  TOP w0.2: J2.21 92.43,12.11 92.43,12.11 110.73,30.42 167.6,30.42 J3.C14
RDATA6: length 75.2
  TOP w0.2: J2.23 112.61,29.75 161.86,29.75
RDATA7: length 73.9
  TOP w0.2: J2.25 97.51,12.11 97.51,12.12 114.48,29.09 161.61,29.09 161.61,29.08 162.53,29.08 J3.G12
RI2C_DAT+: length 113.1
  TOP w0.2: J3.G6 162.53,21.46 161.62,21.46 161.19,21.9 112.3,21.9 97.64,7.23 58.8,7.23 J1.38
RI2C_DAT-: length 115.1
  TOP w0.2: J3.G7 162.53,22.73 161.61,22.73 161.15,22.28 112.14,22.28 97.48,7.61 59.1,7.61 58.26,8.45 58.26,9.27 57.2,10.34 J1.37
RPON: length 17.9
  TOP w0.2: U2.1 v1(72.74,24.66)
  BOTTOM w0.2: J2.8 72.74,10.08 v1(72.74,24.66)
RRESET*: length 12.8
  TOP w0.2: J1.30 45.73,10.14 45.73,12.28 45.17,12.84 U3.3
RTIN+: length 152.5
  TOP w0.2: 34.34,8.83 35.4,9.9 35.4,11.81 34.73,12.49 34.73,27.47 48.9,41.64 161.4,41.64 161.86,41.18
RTIN-: length 149.9
  TOP w0.2: J3.H23 161.42,42.02 48.74,42.02 34.34,27.61 34.34,11.37
RTOUT+: length 159.4
  TOP w0.2: J3.H25 161.4,45.45 160.49,45.45 158.02,42.98 44.74,42.98 29.65,27.9 29.65,12.48 30.32,11.81 30.32,9.9 J1.16
RTOUT-: length 156.8
  TOP w0.2: J1.15 29.26,28.04 44.58,43.36 157.86,43.36 160.33,45.83 161.42,45.83 J3.H26
RTRIGOUT+: length 166.9
  TOP w0.2: J3.G9 163.57,25.12 164.26,25.12 164.91,24.47 164.91,14.26 164.56,13.91 111.81,13.91 100.06,2.16 24.25,2.16 19.11,7.3 19.11,7.84 19.1,7.85 J1.8
RTRIGOUT-: length 172.1
  TOP w0.2: 163.13,25.94 163.57,25.5 164.41,25.5 165.3,24.61 165.3,14.09 164.73,13.52 111.96,13.52 100.22,1.78 24.09,1.78 18.73,7.15 18.73,7.7 18.04,8.39 18.04,9.27 18.73,9.96 18.73,10.01 19.1,10.39 J1.7
SUPPLY_1: length 35.8
  TOP w0.2: J1.34 J1.33
  TOP w0.5: C3.2 v1(49.85,45.55)
  L3 w0.2: J1.34 53.31,8.83 ; J1.34 53.01,9.73 ; J1.34 53.01,7.94 ; J1.34 52.12,7.64 ; J1.34 51.23,7.94 ; J1.34 50.93,8.83 ; J1.34 51.23,9.73 ; J1.34 52.12,10.02 ; 50.93,11.37 J1.33 ; J1.33 51.23,10.48 ; J1.33 53.31,11.37 ; J1.33 51.23,12.27 ; J1.33 52.12,10.18 ; J1.33 52.12,12.56 ; J1.33 53.01,10.48 ; J1.33 53.01,12.27
  BOTTOM w0.2: IC2.5 24.27,43.53 v1(24.28,43.52) C8.2 v1(25.21,42.59) ; IC1.5 v1(30.35,39.41)
  BOTTOM w0.5: U1.36 v1(48.08,46.42) ; R6.2 v1(40.89,41.32) ; R4.2 v1(34.04,42.23) ; R7.2 v1(43.45,45.6) ; R5.2 v1(38.1,41.35) ; U1.35 v1(47.08,46.43) ; R3.2 v1(24.77,40.01) ; R2.2 v1(31.97,40.06) ; U1.22 v1(34.08,46.42)
UNNAMED_2_CAPCERSMDCL2_I501_B: length 1.9
  BOTTOM w0.5: U1.15 27.08,46.61 C6.2
UNNAMED_2_CAPCERSMDCL2_I503_B: length 1.7
  BOTTOM w0.5: C5.2 37.08,45.92 U1.25
UNNAMED_2_CAPCERSMDCL2_I505_B: length 3.1
  BOTTOM w0.5: U1.34 46.08,46.37 46.08,46.36 C4.2
UNNAMED_8_CON26P_I485_A: length 2.8
  BOTTOM w0.5: J2.7 73.95,12.4 73.94,12.42 R8.1
UNNAMED_8_CON26P_I485_A_1: length 6
  TOP w0.2: J2.10 77.79,10.17 77.79,13.61 77.78,13.61 R9.1
UNNAMED_8_CON26P_I485_A_2: length 2.9
  TOP w0.2: R10.1 76.49,13.61 76.49,13.61 J2.9

## Copper pours and planes (outline as drawn; the poured copper is in the pictures)
GND_SIGNAL on L2: 1.03,0.79 1.03,72.79 13.08,72.79 13.08,54.28 13.08,54.27 52.21,54.27 52.21,72.79 173.03,72.79 173.03,5.79 105.03,5.79 100.03,0.79
P2V5 on L5: 1.03,0.79 1.03,72.79 13.08,72.79 13.08,54.28 52.19,54.28 52.2,54.28 52.2,72.79 173.03,72.79 173.03,5.79 105.03,5.79 100.03,0.79
P3V3 on L4: 1.03,72.79 1.03,5.79 1.03,5.78 1.03,0.79 100.03,0.79 105.03,5.79 173.03,5.79 173.03,72.79 52.2,72.79 52.2,54.28 13.07,54.28 13.08,54.29 13.08,72.79
Net_3 on L3: 1.03,5.79 1.03,0.79 100.03,0.79 105.03,5.79
SUPPLY_1 on L3: 1.03,0.79 1.03,5.79 1.03,72.79 13.08,72.79 13.08,54.28 13.08,54.27 52.2,54.27 52.21,54.28 52.21,72.79 173.03,72.79 173.03,5.79 105.03,5.79 100.03,0.79

Small or netless copper shapes (teardrops, artwork), in the pictures only: 1 on L4

## Text on the board
BOTTOM: 6
Ref Des/Silkscreen Bottom: 1 | GND | 1v25d_s | 3V3 | 2v5_s | 2V5 | clk | data | trig | data_clk | rst | scl | clkb | data* | trig* | 1v25a_s | lmon_2v2 | data_clk* | sda_tocbc | lmon_1v25a | lmon_1v25d | sda_fromcbc | uob-hep-pc036a_cbc_fmc_v2 | rst_2v5 | clk_2v5 | data_clk_2v5 | trg_2v5 | data_2v5 | WARNING: | Do *NOT* connect | to V1 CBC carrier *** | Sda_Tocbc_2v5 | Scl_2v5 | Sda_fromcbc_2v5
User.Comments: pc036a_cbc_fmc_v2 | FMC to interface CBC to FPGA board.
TOP: 1
L2: 2
L3: 3
L4: 4
L5: 5
DISPLAY_BOTTOM: FIGURE | SIZE | 0.3302 | 0.6 | 0.9144 | 1.016 | 1.2 | 2.6924 | 1.3 | DRILL CHART: TOP to BOTTOM | ALL UNITS ARE IN MILLIMETERS | PLATED | NON-PLATED | QTY | 227 | 12 | 1 | 33 | 5 | 4 | 2
